# Altium PCB TEMP008-1P-2O.PcbDoc
Units mil, origin at the board's own origin, x right, y up, seen from the top; angles counter-clockwise.
Board outline 5100 x 4360 mil, 2 copper layers (Top Layer, Bottom Layer); 93 components, 50 nets, 253 pads, 13 vias.
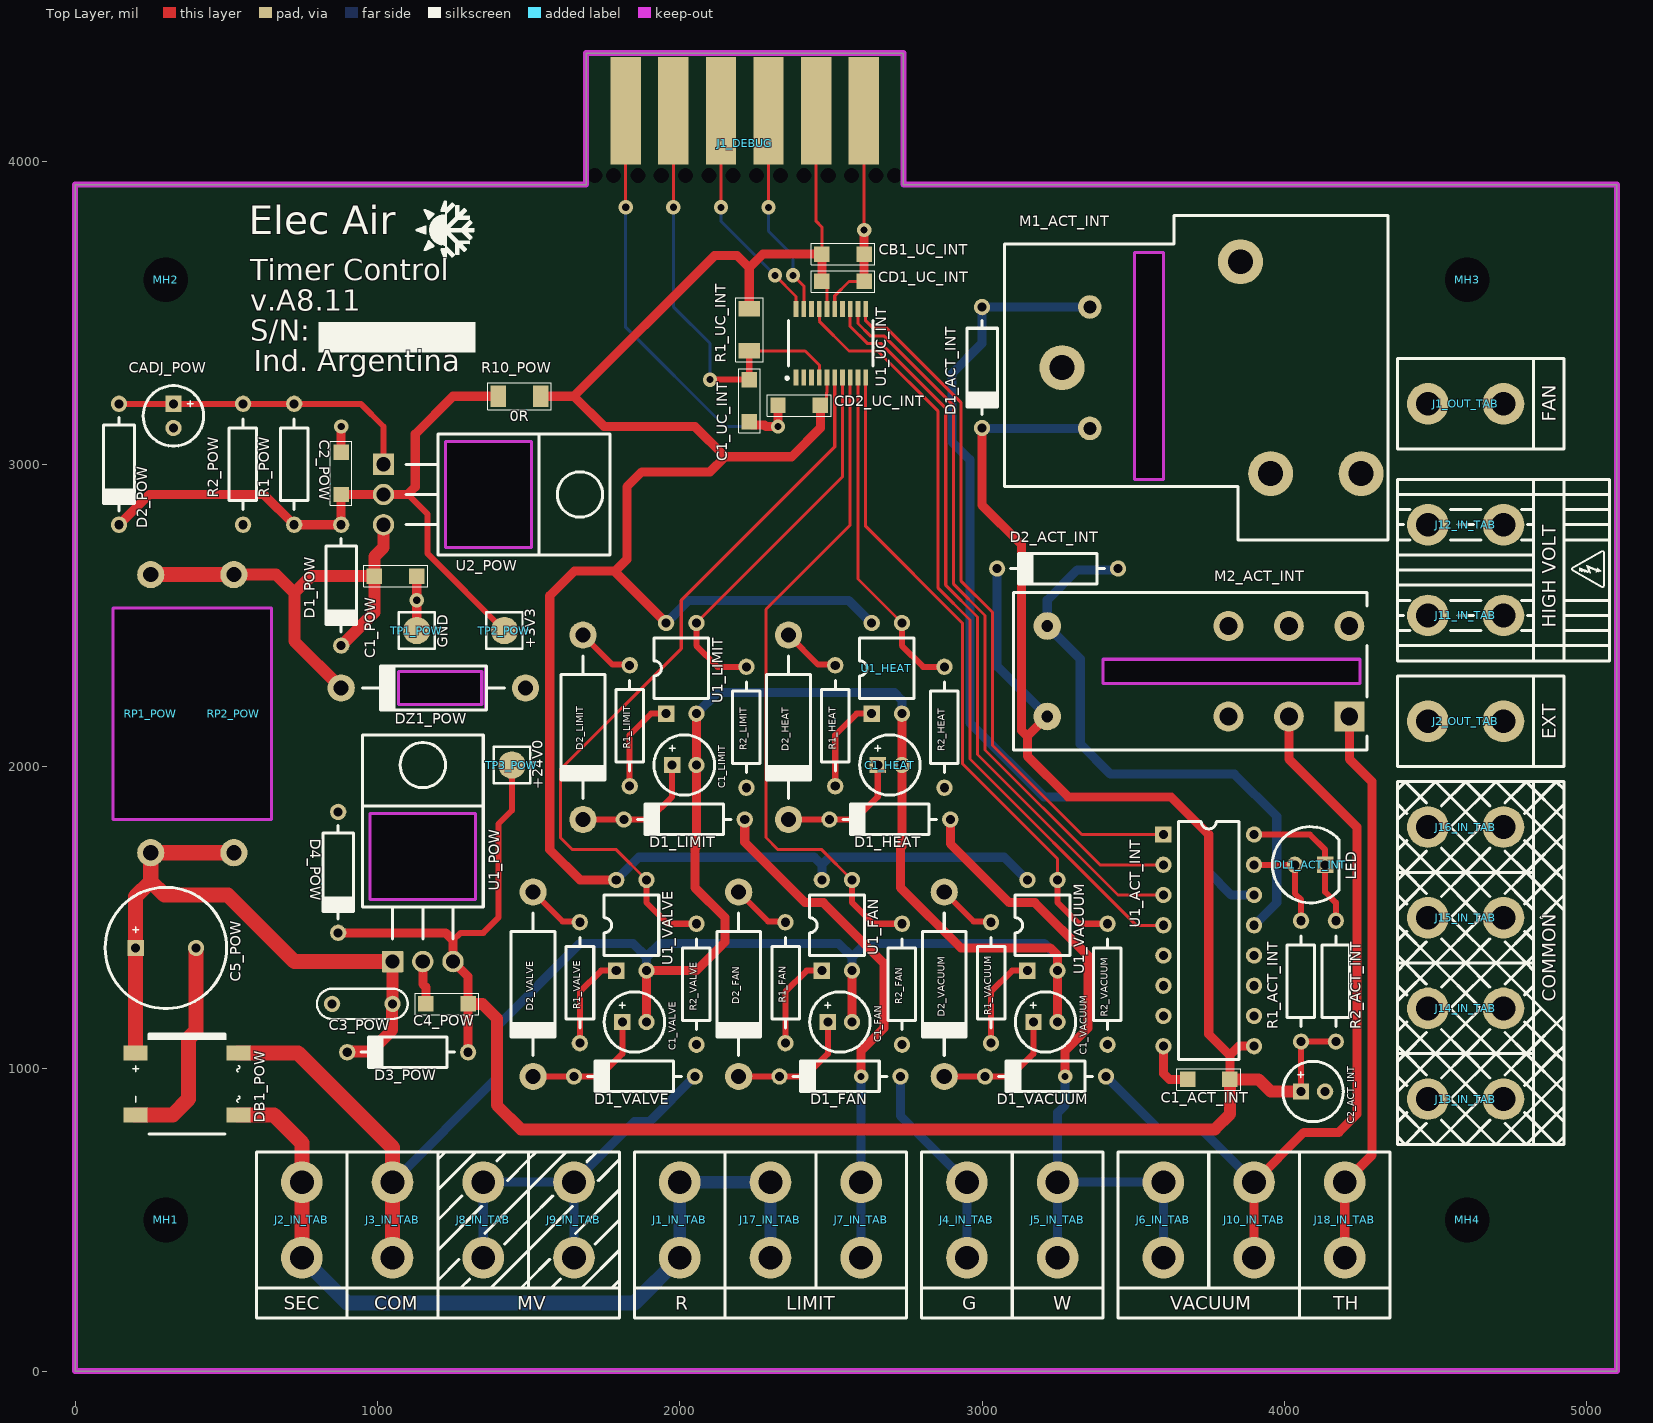
[diagram p0: Top Layer view]
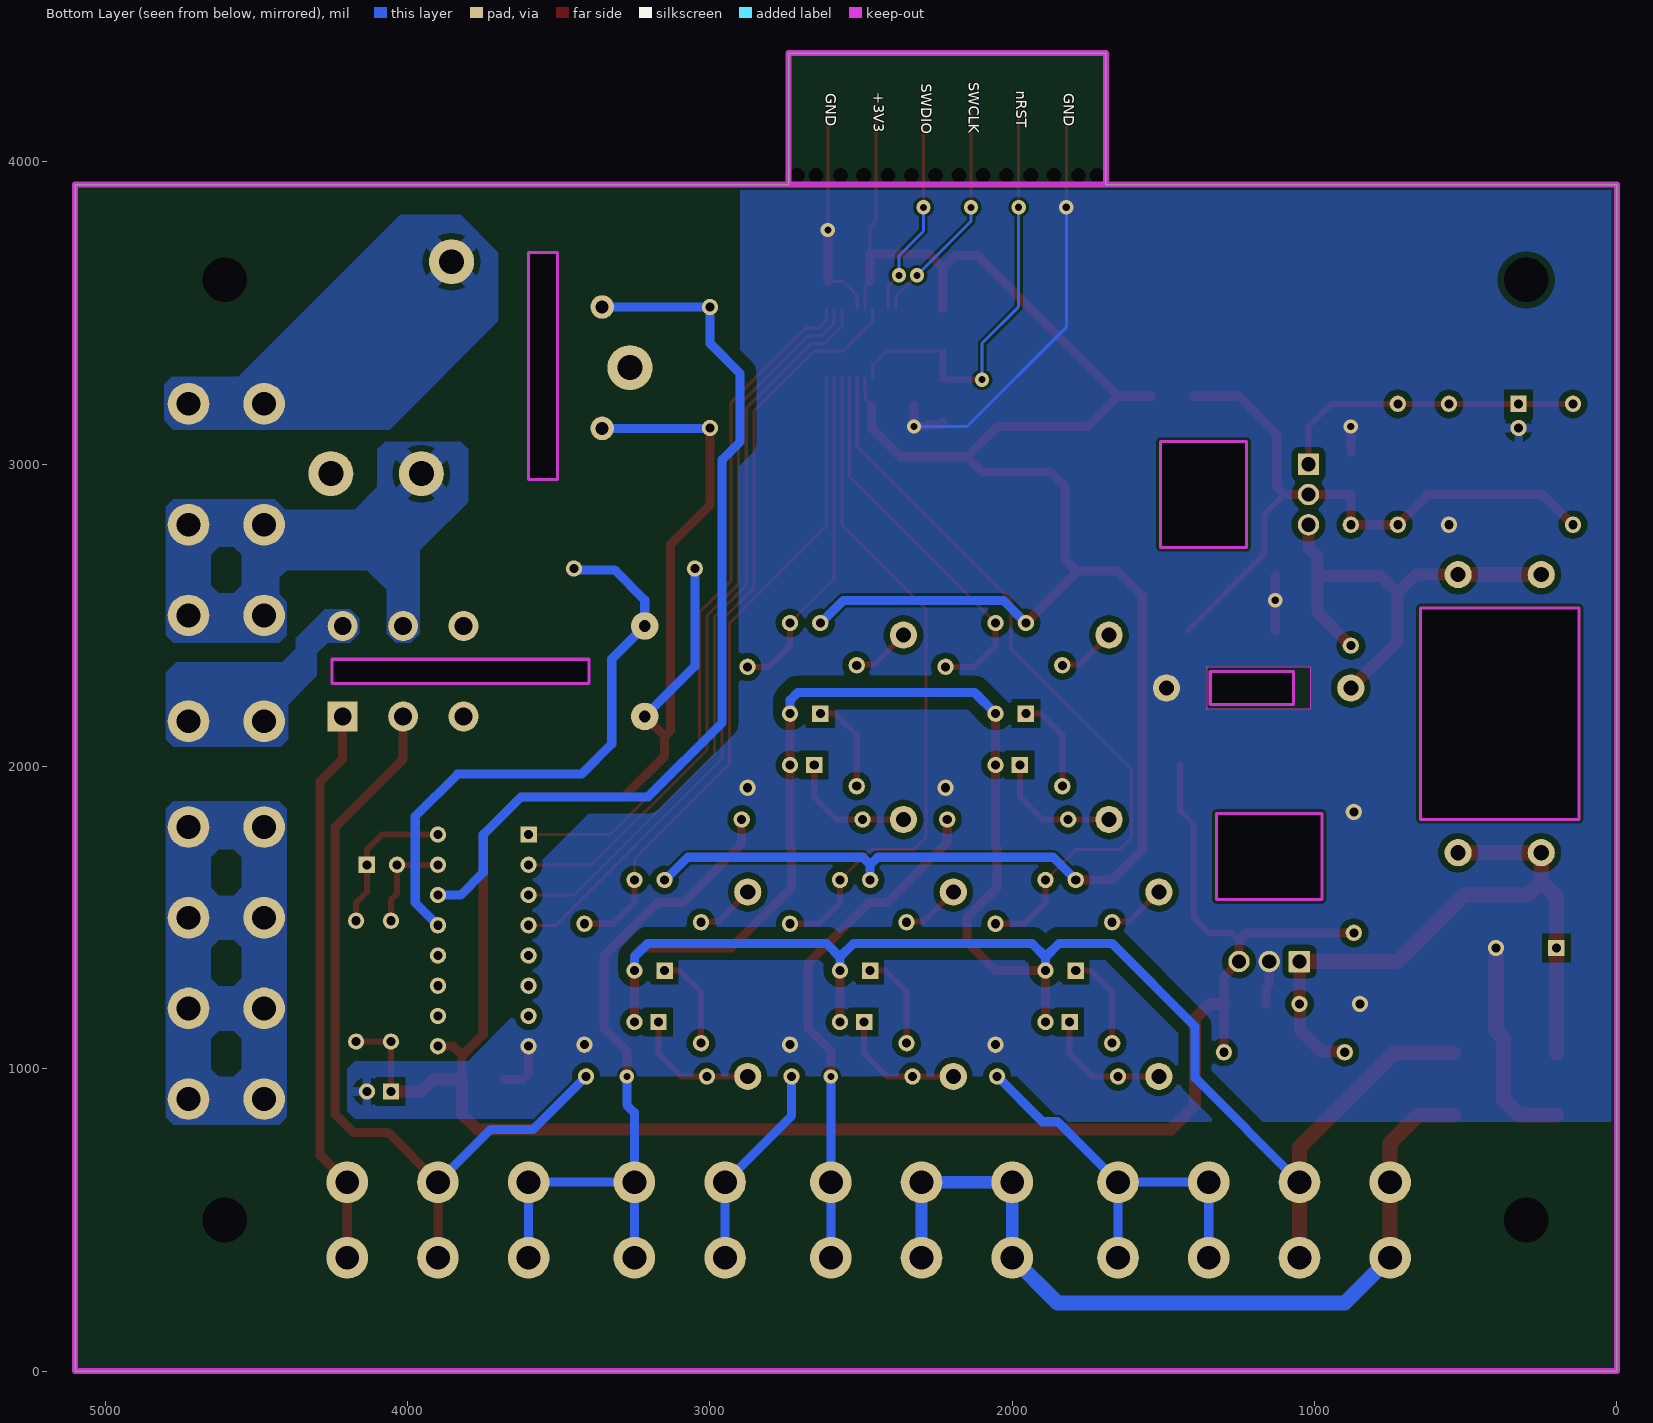
[diagram p1: Bottom Layer view, seen from below]
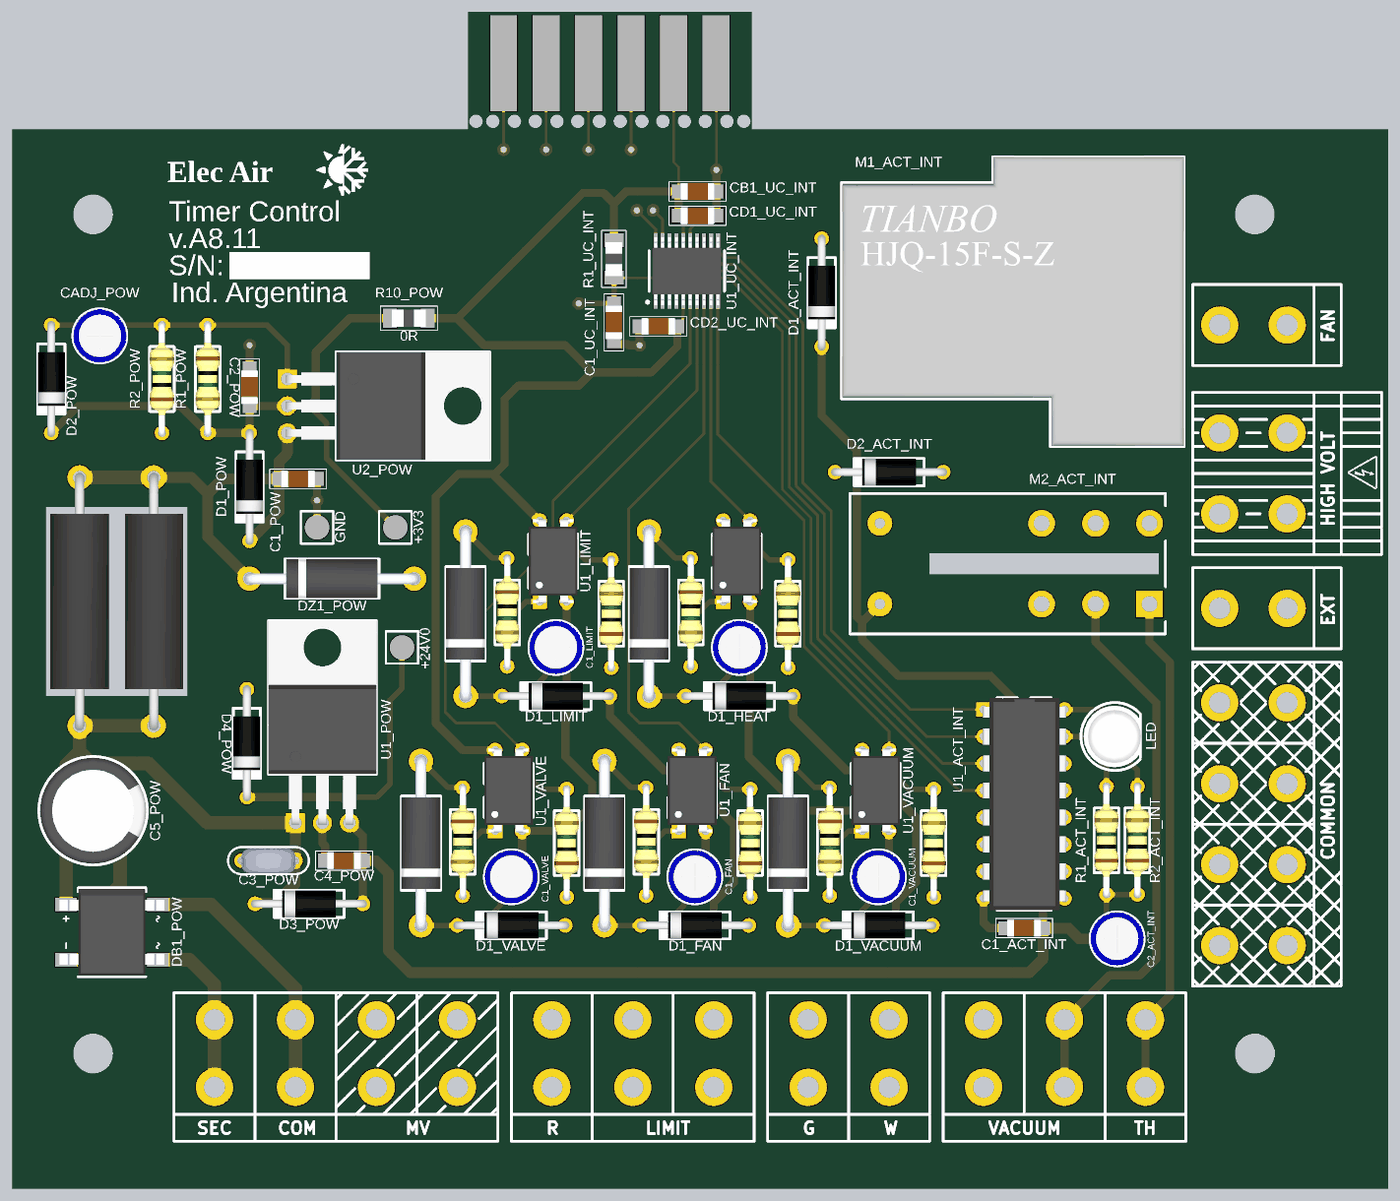
[diagram p2: 3D render of the assembled board from above, using the file's embedded part models]

## Layer stack, top to bottom
Top Solder: solder mask 0.4, Solder Resist, Dk 3.5
Top Layer: signal copper 1.4
Dielectric 1: dielectric 12.6, FR-4, Dk 4.8
Bottom Layer: signal copper 1.4
Bottom Solder: solder mask 0.4, Solder Resist, Dk 3.5

## Board outline
0,0 0,3925 1690,3925 1690,4360 2740,4360 2740,3925 5100,3925 5100,0
cut-out: 1070,2205 1070,2315 1345,2315 1345,2205
cut-out: 975,1560 975,1845 1325,1845 1325,1560
cut-out: 3400,2275 3400,2355 4250,2355 4250,2275
cut-out: 3505,2950 3600,2950 3600,3700 3505,3700
cut-out: 1225,2725 1225,3075 1510,3075 1510,2725
cut-out: 125,1825 125,2525 650,2525 650,1825

## Design rules (kind name [scope] priority, off if disabled: settings)
BoardOutlineClearance [NOT (InPadClass('J1-DEBUG'))] p1: gap=7.87 ignorepadtopadclearanceinfootprint=FALSE except(15.75: Arc-SplitBarrior Arc-SplitContinuation Track-SplitBarrior Track-SplitContinuation SMDPad-SplitBarrior SMDPad-SplitContinuation THPad-SplitBarrior THPad-SplitContinuation Via-SplitBarrior Via-SplitContinuation Fill-SplitBarrior Fill-SplitContinuation Poly-SplitBarrior Poly-SplitContinuation Region-SplitBarrior Region-SplitContinuation Text-SplitBarrior Text-SplitContinuation)
Clearance Clearance_Poly_Fiducials [InPolygon vs InComponentClass('Fiducials')] p1: gap=20 ignorepadtopadclearanceinfootprint=FALSE
Clearance Clearance_Poly_Tooling [InPolygon vs InComponentClass('Tooling')] p2: gap=10 ignorepadtopadclearanceinfootprint=FALSE
Clearance Clearance_Poly_THT [InPolygon vs InThruComponent] p3: gap=20 ignorepadtopadclearanceinfootprint=FALSE
Clearance Clearance_Poly_GRL [InPolygon vs IsVia] p4: gap=10 ignorepadtopadclearanceinfootprint=FALSE
Clearance Clearance_Poly_RTN [InPolygon AND InNet('GND') vs InNet('RTN') OR InNet('FAN_DRV')] p5: gap=40 ignorepadtopadclearanceinfootprint=FALSE
Clearance PCB-TAB [InPadClass('J1-DEBUG') vs IsTrack] p6: gap=-1 ignorepadtopadclearanceinfootprint=FALSE
Clearance "Clearance Bottom Layer" [OnLayer('Bottom Layer')] p7: gap=8 ignorepadtopadclearanceinfootprint=TRUE except(10: Arc-Text Track-Text SMDPad-Text THPad-Text Via-Text Fill-Text Poly-Text Region-Text Text-Text)
Clearance "Clearance Top Layer" [OnLayer('Top Layer')] p8: gap=8 ignorepadtopadclearanceinfootprint=TRUE except(10: Arc-Text Track-Text SMDPad-Text THPad-Text Via-Text Fill-Text Poly-Text Region-Text Text-Text)
Clearance [All] p9: gap=7.87 ignorepadtopadclearanceinfootprint=FALSE except(3.5: Arc-Arc Arc-Track Arc-SMDPad Track-Track Track-SMDPad SMDPad-SMDPad; 5: Arc-Via Track-Via SMDPad-Via THPad-Via Via-Via; 10: Arc-Text Track-Text SMDPad-Text THPad-Text Via-Text Fill-Text Poly-Text Region-Text Text-Text)
ComponentClearance MH [InComponentClass('MountHole') vs InComponentClass('Fiducials')  OR InComponentClass('Tooling')] p1: gap=-1 collisioncheckmode=3 verticalgap=-1 showdistances=FALSE
ComponentClearance [All] p2: gap=10 collisioncheckmode=3 verticalgap=10 showdistances=FALSE
HoleSize [All] p1: absolutevalues=TRUE maxlimit=248.03 minlimit=7.87 maxpercent=80.000 minpercent=20.000
MinimumAnnularRing [All] p1: minimumring=3
MinimumSolderMaskSliver [All] p1: minsoldermaskwidth=3.94
PolygonConnect Relay [HasFootprint('HJQ-15F-FORM-C') vs IsPolygon] p1: connectstyle=Relief reliefconductorwidth=55 reliefentries=4 polygonreliefangle="45 Angle" airgapwidth=20
PolygonConnect Components [HasFootprint('TAB250') vs IsPolygon] p2: connectstyle=Direct reliefconductorwidth=20 reliefentries=4 polygonreliefangle="90 Angle" airgapwidth=20
PolygonConnect CAP100RP [HasFootprint('CAP100RP') vs IsPolygon] p3: connectstyle=Relief reliefconductorwidth=30 reliefentries=4 polygonreliefangle="90 Angle" airgapwidth=20
PolygonConnect [All] p4: thpad.connectstyle=Direct thpad.reliefconductorwidth=20 thpad.reliefentries=4 thpad.polygonreliefangle="90 Angle" thpad.airgapwidth=20 smdpad.connectstyle=Relief smdpad.reliefconductorwidth=40 smdpad.reliefentries=4 smdpad.polygonreliefangle="90 Angle" smdpad.airgapwidth=20 via.connectstyle=Direct via.reliefconductorwidth=20 via.reliefentries=4 via.polygonreliefangle="90 Angle" via.airgapwidth=10
RoutingCorners [All] p1: cornerstyle=Round minsetback=100 maxsetback=100
RoutingVias [All] p1: holewidth=19.68 width=39.37 viastyle="Through Hole" minholewidth=7.87 minwidth=17.72 maxholewidth=39.37 maxwidth=78.74
SilkToSilkClearance [All] p1: silktosilkclearance=3.94
SilkToSolderMaskClearance [IsPad] p1: minsilkscreentomaskgap=3.94 clearancetoexposedcopper=TRUE
SolderMaskExpansion [All] p1: expansion=4 istentingtop=FALSE
Width [All] p1: maxlimit=200 minlimit=6 preferedwidth=15
24 further rules are at their usual default settings.

## Classes and differential pairs
pad class J1-DEBUG: J1_DEBUG-1 J1_DEBUG-2 J1_DEBUG-3 J1_DEBUG-4 J1_DEBUG-5 J1_DEBUG-6 J1_DEBUG-NC
component class DEBUG: J1_DEBUG
component class Temporizador_V8_top: LL1 MH1 MH2 MH3 MH4 TL1 TL2
channel class InputISO_Block: FAN HEAT LIMIT VACUUM VALVE
component class VALVE: C1_VALVE D1_VALVE D2_VALVE R1_VALVE R2_VALVE U1_VALVE
component class VACUUM: C1_VACUUM D1_VACUUM D2_VACUUM R1_VACUUM R2_VACUUM U1_VACUUM
component class UC_INT: C1_UC_INT CB1_UC_INT CD1_UC_INT CD2_UC_INT R1_UC_INT U1_UC_INT
component class MountHole: MH1 MH2 MH3 MH4
component class POW: C1_POW C2_POW C3_POW C4_POW C5_POW CADJ_POW D1_POW D2_POW D3_POW D4_POW DB1_POW DZ1_POW R1_POW R2_POW R10_POW RP1_POW RP2_POW TP1_POW TP2_POW TP3_POW U1_POW U2_POW
component class OUT_TAB: J1_OUT_TAB J2_OUT_TAB
component class LIMIT: C1_LIMIT D1_LIMIT D2_LIMIT R1_LIMIT R2_LIMIT U1_LIMIT
component class IN_TAB: J1_IN_TAB J2_IN_TAB J3_IN_TAB J4_IN_TAB J5_IN_TAB J6_IN_TAB J7_IN_TAB J8_IN_TAB J9_IN_TAB J10_IN_TAB J11_IN_TAB J12_IN_TAB J13_IN_TAB J14_IN_TAB J15_IN_TAB J16_IN_TAB J17_IN_TAB J18_IN_TAB
component class HEAT: C1_HEAT D1_HEAT D2_HEAT R1_HEAT R2_HEAT U1_HEAT
component class FAN: C1_FAN D1_FAN D2_FAN R1_FAN R2_FAN U1_FAN
component class ACT_INT: C1_ACT_INT C2_ACT_INT D1_ACT_INT D2_ACT_INT DL1_ACT_INT M1_ACT_INT M2_ACT_INT R1_ACT_INT R2_ACT_INT U1_ACT_INT

## Components (designator, comment, footprint, x,y, rotation, side; value= is the part's Value field where it differs from the comment)
C1_ACT_INT "0.1uF" 1206-CAP-TDK 3750,965 r0 top (schematic designator C1)
C1_FAN "10uF/50V" CAP100RP 2530,1155 r0 top (schematic designator C1)
C1_HEAT "10uF/50V" CAP100RP 2695,2005 r0 top (schematic designator C1)
C1_LIMIT "10uF/50V" CAP100RP 2015,2005 r0 top (schematic designator C1)
C1_POW "0.1uF" 1206-CAP-TDK 1060,2630 r180 top (schematic designator C1)
C1_UC_INT "0.1uF" 1206-CAP-TDK 2230,3210 r90 top (schematic designator C1)
C1_VACUUM "10uF/50V" CAP100RP 3210,1155 r0 top (schematic designator C1)
C1_VALVE "10uF/50V" CAP100RP 1850,1155 r0 top (schematic designator C1)
C2_ACT_INT "10uF/50V" CAP100RP 4095,925 r0 top (schematic designator C2)
C2_POW "0.1uF" 1206-CAP-TDK 880,2970 r270 top (schematic designator C2)
C3_POW "0.33uF" CAP200 950,1215 r0 top (schematic designator C3)
C4_POW "0.1uF" 1206-CAP-TDK 1230,1215 r0 top (schematic designator C4)
C5_POW "100uF/63V" CAP200RP 300,1400 r0 top (schematic designator C5)
CADJ_POW "10uF/50V" CAP100RP 325,3160 r270 top (schematic designator CADJ)
CB1_UC_INT "4.7uF/50V" 1206-CAP-TDK 2540,3695 r180 top (schematic designator CB1)
CD1_UC_INT "0.1uF" 1206-CAP-TDK 2540,3605 r180 top (schematic designator CD1)
CD2_UC_INT "0.1uF" 1206-CAP-TDK 2395,3195 r0 top (schematic designator CD2)
D1_ACT_INT "1N4148" DO41 3000,3320 r270 top (schematic designator D1)
D1_FAN "1N4007" DO41 2530,975 r180 top (schematic designator D1)
D1_HEAT "1N4007" DO41 2695,1825 r180 top (schematic designator D1)
D1_LIMIT "1N4007" DO41 2015,1825 r180 top (schematic designator D1)
D1_POW "1N4007" DO41 880,2600 r270 top (schematic designator D1)
D1_VACUUM "1N4007" DO41 3210,975 r180 top (schematic designator D1)
D1_VALVE "1N4007" DO41 1850,975 r180 top (schematic designator D1)
D2_ACT_INT "1N4148" DO41 3250,2655 r180 top (schematic designator D2)
D2_FAN "1N4746A-G" DO40 2195,1280 r270 top (schematic designator D2)
D2_HEAT "1N4746A-G" DO40 2360,2130 r270 top (schematic designator D2)
D2_LIMIT "1N4746A-G" DO40 1680,2130 r270 top (schematic designator D2)
D2_POW "1N4007" DO41 145,3000 r270 top (schematic designator D2)
D2_VACUUM "1N4746A-G" DO40 2875,1280 r270 top (schematic designator D2)
D2_VALVE "1N4746A-G" DO40 1515,1280 r270 top (schematic designator D2)
D3_POW "1N4007" DO41 1100,1055 r180 top (schematic designator D3)
D4_POW "1N4007" DO41 870,1650 r270 top (schematic designator D4)
DB1_POW "DB107S" DBS 370,950 r90 top (schematic designator DB1)
DL1_ACT_INT "LED" "LED-5MM - BI" 4085,1675 r0 top (schematic designator DL1)
DZ1_POW "1N5349" DO40 1185,2260 r180 top (schematic designator DZ1)
J1_DEBUG "PCB-TAB6" PCB-TAB6 2215,4170 r0 top locked (schematic designator J1)
J1_IN_TAB "R" TAB250-250P 2000,500 r90 top (schematic designator J1)
J1_OUT_TAB "FAN" TAB250-250P 4600,3200 r180 top (schematic designator J1)
J2_IN_TAB "SEC" TAB250-250P 750,500 r90 top (schematic designator J2)
J2_OUT_TAB "EXT" TAB250-250P 4600,2150 r180 top (schematic designator J2)
J3_IN_TAB "COM" TAB250-250P 1050,500 r90 top (schematic designator J3)
J4_IN_TAB "G" TAB250-250P 2950,500 r90 top (schematic designator J4)
J5_IN_TAB "W" TAB250-250P 3250,500 r90 top (schematic designator J5)
J6_IN_TAB "W" TAB250-250P 3600,500 r90 top (schematic designator J6)
J7_IN_TAB "LIMIT" TAB250-250P 2600,500 r90 top (schematic designator J7)
J8_IN_TAB "MV" TAB250-250P 1350,500 r90 top (schematic designator J8)
J9_IN_TAB "MV" TAB250-250P 1650,500 r90 top (schematic designator J9)
J10_IN_TAB "VACUUM" TAB250-250P 3900,500 r90 top (schematic designator J10)
J11_IN_TAB "HIGH VOLT" TAB250-250P 4600,2500 r180 top (schematic designator J11)
J12_IN_TAB "HIGH VOLT" TAB250-250P 4600,2800 r180 top (schematic designator J12)
J13_IN_TAB "COMMON" TAB250-250P 4600,900 r180 top (schematic designator J13)
J14_IN_TAB "COMMON" TAB250-250P 4600,1200 r180 top (schematic designator J14)
J15_IN_TAB "COMMON" TAB250-250P 4600,1500 r180 top (schematic designator J15)
J16_IN_TAB "COMMON" TAB250-250P 4600,1800 r180 top (schematic designator J16)
J17_IN_TAB "LIMIT" TAB250-250P 2300,500 r90 top (schematic designator J17)
J18_IN_TAB "TH" TAB250-250P 4200,500 r90 top (schematic designator J18)
M1_ACT_INT "FAN" HJQ-15F-FORM-C 3248.7,3319.61 r270 top locked (schematic designator M1)
M2_ACT_INT "EXT" TRA3-2-FORM-C 3684.29,2315.39 r180 top locked (schematic designator M2)
MH1 "MH-3.75MM" MH-3.75mm-NP 300,500 r0 top locked
MH2 "MH-3.75MM" MH-3.75mm-NP 300,3610 r0 top locked
MH3 "MH-3.75MM" MH-3.75mm-NP 4605,3610 r0 top locked
MH4 "MH-3.75MM" MH-3.75mm-NP 4605,500 r0 top
R1_ACT_INT "8K2/1%" RES400 4055,1290 r90 top (schematic designator R1)
R1_FAN "3K3/1%" RES400 2350,1285 r270 top (schematic designator R1)
R1_HEAT "3K3/1%" RES400 2515,2135 r270 top (schematic designator R1)
R1_LIMIT "3K3/1%" RES400 1835,2135 r270 top (schematic designator R1)
R1_POW "240/1%" RES400 725,3000 r270 top (schematic designator R1)
R1_UC_INT "4K7/1%" 1206-RES-PANASONIC 2230,3445 r270 top (schematic designator R1)
R1_VACUUM "3K3/1%" RES400 3030,1285 r270 top (schematic designator R1)
R1_VALVE "3K3/1%" RES400 1670,1285 r270 top (schematic designator R1)
R2_ACT_INT "8K2/1%" RES400 4170,1290 r90 top (schematic designator R2)
R2_FAN "5K6/1%" RES400 2735,1280 r90 top (schematic designator R2)
R2_HEAT "5K6/1%" RES400 2875,2130 r90 top (schematic designator R2)
R2_LIMIT "5K6/1%" RES400 2220,2130 r90 top (schematic designator R2)
R2_POW "390/1%" RES400 555,3000 r90 top (schematic designator R2)
R2_VACUUM "5K6/1%" RES400 3415,1280 r90 top (schematic designator R2)
R2_VALVE "5K6/1%" RES400 2055,1280 r90 top (schematic designator R2)
R10_POW "0R" 1206-RES-PANASONIC 1470,3225 r0 top (schematic designator R10)
RP1_POW "390/3W" "RES1000 - NOSILK" 250,2175 r90 top (schematic designator RP1)
RP2_POW "390/3W" "RES1000 - NOSILK" 525,2175 r90 top (schematic designator RP2)
TP1_POW "GND" "TPTH - PAD TOP" 1130,2450 r0 top (schematic designator TP1)
TP2_POW "+3V3" "TPTH - PAD TOP" 1420,2450 r0 top (schematic designator TP2)
TP3_POW "+24V0" "TPTH - PAD TOP" 1445,2005 r0 top (schematic designator TP3)
U1_ACT_INT "ULN2003" DIP16 3750,1425 r0 top (schematic designator U1)
U1_FAN "TLP521-1GB" DIP4 2520,1475 r90 top (schematic designator U1)
U1_HEAT "TLP521-1GB" DIP4 2685,2325 r90 top (schematic designator U1)
U1_LIMIT "TLP521-1GB" DIP4 2005,2325 r90 top (schematic designator U1)
U1_POW "L7824ACV-DG" "TO-220 - DG - RA" 1150,1355 r0 top (schematic designator U1)
U1_UC_INT "STM32F031F6P7" "ST-TSSOP-20 - STM32F031F6P7" 2500,3400 r90 top (schematic designator U1)
U1_VACUUM "TLP521-1GB" DIP4 3200,1475 r90 top (schematic designator U1)
U1_VALVE "TLP521-1GB" DIP4 1840,1475 r90 top (schematic designator U1)
U2_POW "LM317KCS" "TO-220 - KCS0003B - RA" 1020,2900 r270 top (schematic designator U2)

## Footprints (in the part's own frame and the unit in brackets; to place one, negate y for a bottom-side part, rotate by r counter-clockwise, add the part's x,y. Pads: shape width x height; smd on the part's side, far side on the other; paste and mask are expansions set on the pad)
1206-CAP-TDK [mm]
  rect 1.3x1.3 smd: 1(-1.778,0) 2(1.778,0)
  silkscreen extent -2.68,-0.9 2.68,0.9, body extent -1.6,-0.8 1.6,0.8, height 1.8
1206-RES-PANASONIC [mm]
  rect 1.3x1.8 smd: 1(-1.778,0) 2(1.778,0)
  silkscreen extent -2.68,-1.15 2.68,1.15, body extent -1.6,-0.8 1.6,0.8, height 0.65
CAP100RP [mil] "Body diameter 5mm"
  rect 54x54 hole 30: 1(-40,0)
  round 54 hole 30: 2(40,0)
  silkscreen extent -100,-100 100,100, body extent -99,-99 99,100, height 454
CAP200 [mil]
  round 54 hole 30: 1(-100,0) 2(100,0)
  silkscreen extent -150,-50 150,50, body extent -110,-46 110,44, height 246
CAP200RP [mil] "Body Diameter 10.33mm"
  rect 54x54 hole 30: 1(-100,0)
  round 54 hole 30: 2(100,0)
  silkscreen extent -201,-201 201,201, body extent -197,-197 197,197, height 787
DBS [mil]
  rect 50x80 smd: 1(-102.36,-170) 2(102.36,170) 3(102.36,-170) 4(-102.36,170)
  silkscreen extent -165,-175 165,180, body extent -160,-195 160,195, height 106
DIP4 [mil]
  rect 54x54 hole 30: 1(-150,50)
  round 54 hole 30: 2(-150,-50) 3(150,-50) 4(150,50)
  silkscreen extent -100,-91 100,91, body extent -155,-91 155,91, height 173
DIP16 [mil]
  rect 54x54 hole 30: 1(-150,350)
  round 54 hole 30: 2(-150,250) 3(-150,150) 4(-150,50) 5(-150,-50) 6(-150,-150) 7(-150,-250) 8(-150,-350) 9(150,-350) 10(150,-250) 11(150,-150) 12(150,-50) 13(150,50) 14(150,150) 15(150,250) 16(150,350)
  silkscreen extent -100,-394 100,394, body extent -153,-394 157,394, height 78
DO40 [mil]
  round 90 hole 50: 1(-305,0) 2(305,0)
  silkscreen extent -235,-73 235,73, body extent -324,-73 324,73, height 145
DO41 [mil]
  round 54 hole 30: 1(-200,0) 2(200,0)
  silkscreen extent -155,-51 155,51, body extent -215,-51 215,51, height 80
HJQ-15F-FORM-C [mm]
  round 3.78 hole 2.1: 1C(0,0.404) 1S(-8.9,15.4) 3(8.9,17.94) 4(8.9,25.54)
  round 1.98 hole 1.1: 2(5.1,2.74) 5(-5.1,2.74)
  silkscreen extent -12.8,-4.45 14.48,27.8, body extent -12.8,-4.4 14.4,27.8, height 20.2
"LED-5MM - BI" [mil]
  round 54 hole 30: 1(-50,0)
  rect 54x54 hole 30: 2(50,0)
  silkscreen extent -124,-126 96,126, body extent -114,-114 99,114, height 476
MH-3.75mm-NP [mm]
  round 3 hole 3.75 unplated: 1(0,0)
PCB-TAB6 [mil] "External Tabs x 6, Pitch 4mm"
  rect 100x355 smd: 1(-393.7,0) 2(-236.22,0) 3(-78.74,0) 4(78.74,0) 5(236.22,0) 6(393.7,0)
  round 30 hole 50 unplated: NC(-496.18,-215) NC(-433.7,-215) NC(-353.7,-215) NC(-276.22,-215) NC(-196.22,-215) NC(-118.74,-215) NC(-38.74,-215) NC(38.74,-215) NC(118.74,-215) NC(196.22,-215) NC(276.22,-215) NC(353.7,-215) NC(433.7,-215) NC(496.18,-215)
RES400 [mil]
  round 54 hole 30: 1(-200,-0.5) 2(200,-0.5)
  silkscreen extent -150,-46 150,46, body extent -212,-46 212,46, height 96
"RES1000 - NOSILK" [mil]
  round 90 hole 50: 1(-460,0) 2(460,0)
  body extent -477,-109 477,109, height 225
"ST-TSSOP-20 - STM32F031F6P7" [mm]
  rect 1.35x0.4 smd mask+0.05: 1(-2.875,2.925) 2(-2.875,2.275) 3(-2.875,1.625) 4(-2.875,0.975) 5(-2.875,0.325) 6(-2.875,-0.325) 7(-2.875,-0.975) 8(-2.875,-1.625) 9(-2.875,-2.275) 10(-2.875,-2.925) 11(2.875,-2.925) 12(2.875,-2.275) 13(2.875,-1.625) 14(2.875,-0.975) 15(2.875,-0.325) 16(2.875,0.325) 17(2.875,0.975) 18(2.875,1.625) 19(2.875,2.275) 20(2.875,2.925)
  silkscreen extent -3.02,-3.56 1.91,3.78, body extent -3.2,-3.25 3.2,3.25, height 1.23
TAB250-250P [mm]
  round 3.5 hole 2: 1(-3.175,0) 2(3.175,0)
  silkscreen extent -5.71,-3.81 5.71,3.81, body extent -3.87,-1.55 3.87,1.55, height 9.91
"TO-220 - DG - RA" [mm]
  rrect6% 1.8x1.8 hole 1.2 mask+0.07: 1(-2.54,0)
  round 1.8 hole 1.2 mask+0.07: 2(0,0) 3(2.54,0)
  silkscreen extent -5.08,1.91 5.08,19.05, body extent -5.08,-0.19 5.08,19.09, height 4.45
"TO-220 - KCS0003B - RA" [mm]
  rrect6% 1.8x1.8 hole 1.2 mask+0.07: 1(-2.54,0)
  round 1.8 hole 1.2 mask+0.07: 2(0,0) 3(2.54,0)
  silkscreen extent -5.08,1.9 5.08,19.05, body extent -5.08,-0.19 5.08,19.09, height 4.45
"TPTH - PAD TOP" [mm]
  round 2.3 smd: 1(0,0)
  silkscreen extent -1.52,-1.52 1.52,1.52
TRA3-2-FORM-C [mm]
  rect 2.52x2.52 hole 1.5: 1(-13.48,3.8)
  round 2.52 hole 1.5: 2(-8.4,3.8) 3(-3.32,3.8) 6(-3.32,-3.8) 7(-8.4,-3.8) 8(-13.48,-3.8)
  round 2.32 hole 1: 4(11.9,3.8) 5(11.9,-3.8)
  silkscreen extent -14.99,-6.6 14.73,6.6, body extent -14.5,-6.35 14.5,6.35, height 20.4

## Part data
C1_ACT_INT C1_POW C1_UC_INT C2_POW C4_POW CD1_UC_INT CD2_UC_INT: library part CAP-SMD, JLCPart=C24497
C1_FAN C1_HEAT C1_LIMIT C1_VACUUM C1_VALVE C2_ACT_INT CADJ_POW: library part CAPPOL-THT, JLCPart=C2960372
C3_POW: library part CAP-THT, JLCPart=C2761750
C5_POW: library part CAPPOL-THT, JLCPart=C165651
CB1_UC_INT: library part CAP-SMD, JLCPart=C29823
D1_ACT_INT D2_ACT_INT: library part "DIODE SCHOTTKY", "Diode Schottky", JLCPart=C258182
D1_FAN D1_HEAT D1_LIMIT D1_POW D1_VACUUM D1_VALVE D2_POW D3_POW D4_POW: library part "DIODE RECTIFIER", "Diode Rectifier", JLCPart=C3033995
D2_FAN D2_HEAT D2_LIMIT D2_VACUUM D2_VALVE: library part "DIODE ZENER", "Diode Zener", JLCPart=C391338
DB1_POW: "Bridge Rectifier Single Phase Standard 1000 V Surface Mount 4-MiniDIP", JLCPart=C5377
DL1_ACT_INT: library part LED-BI
DZ1_POW: library part "DIODE ZENER", "Diode Zener", JLCPart=C232446
J1_IN_TAB J1_OUT_TAB J2_IN_TAB J2_OUT_TAB J3_IN_TAB J4_IN_TAB J5_IN_TAB J6_IN_TAB J7_IN_TAB J8_IN_TAB J9_IN_TAB J10_IN_TAB J11_IN_TAB J12_IN_TAB J13_IN_TAB J14_IN_TAB J15_IN_TAB J16_IN_TAB J17_IN_TAB J18_IN_TAB: library part TAB250
M1_ACT_INT: library part "RELE SIMPLE M"
M2_ACT_INT: library part "RELE DOBLE"
R1_ACT_INT R2_ACT_INT: library part RES-THT, JLCPart=C337170
R1_FAN R1_HEAT R1_LIMIT R1_VACUUM R1_VALVE: library part RES-THT, JLCPart=C119335
R1_POW: library part RES-THT, JLCPart=C119310
R1_UC_INT: library part RES-SMD, JLCPart=C17936
R2_FAN R2_HEAT R2_LIMIT R2_VACUUM R2_VALVE: library part RES-THT, JLCPart=C173035
R2_POW: library part RES-THT, JLCPart=C119315
R10_POW: library part RES-SMD
RP1_POW RP2_POW: library part RES-THT, JLCPart=C348872
TP1_POW TP2_POW TP3_POW: library part TP-PAD
U1_ACT_INT: JLCPart=C93000
U1_FAN U1_HEAT U1_LIMIT U1_VACUUM U1_VALVE: library part TLP521-1, JLCPart=C69256
U1_UC_INT: "ARM® Cortex®-M0 STM32F0 Microcontroller IC 32-Bit Single-Core 48MHz 32KB (32K x 8) FLASH 20-TSSOP", JLCPart=C117472
MH1 MH2 MH3 MH4: ClassName=MountHole

## Via types
v1: diameter 47.24, hole 23.62, Top Layer to Bottom Layer, tented both sides, 13 vias

## Nets (pads, with @x,y where several pads share a name; then routed paths per layer and width w, separated by ;. In a path a pad name is that pad's centre, name@x,y a point inside that pad or via, vN(x,y) a via of type N, cw(c..) or ccw(c..) an arc to the next point about the centre after c; other vN are vias at no path point)
220V_AC: J11_IN_TAB.1 J11_IN_TAB.2 J12_IN_TAB.1 J12_IN_TAB.2 M1_ACT_INT.3 M2_ACT_INT.7
+3V3: CB1_UC_INT.2 CD1_UC_INT.2 CD2_UC_INT.2 J1_DEBUG.5 R1_UC_INT.1 R10_POW.2 U1_FAN.4 U1_HEAT.4 U1_LIMIT.4 U1_UC_INT.5 U1_UC_INT.16 U1_VACUUM.4 U1_VALVE.4 | length 7567.1
  Top Layer w10: J1_DEBUG.5 2451.22,3803.78 2470,3785 CB1_UC_INT.2 ; CD2_UC_INT.2 2485,3215 2485,3235 2487.2,3237.2 U1_UC_INT.5 ; CD1_UC_INT.2 2487.2,3587.8 U1_UC_INT.16
  Top Layer w30: R10_POW.2 1650,3225 ; U1_VALVE.4 1670,1625 1570,1725 1570,2565 1652.5,2647.5 1787.5,2647.5 ; U1_LIMIT.4 1787.5,2642.5 1787.5,2647.5 ; R1_UC_INT.1 2230,3650 ; CD2_UC_INT.2 2465,3120 2370,3025 2150,3025 ; CD1_UC_INT.2 CB1_UC_INT.2 2275,3695 2230,3650 ; 1650,3225 1750,3125 2050,3125 2150,3025 ; 1650,3225 2115,3690 2190,3690 2230,3650 ; 1787.5,2647.5 1825,2685 1825,2925 1875,2975 2100,2975 2150,3025
  Bottom Layer w30: U1_VALVE.4 1865,1700 2445,1700 2470,1675 ; U1_LIMIT.4 2030,2550 2558.18,2550 2633.18,2475 U1_HEAT.4 ; U1_FAN.4 2470,1675 ; U1_VACUUM.4 3148.18,1625 3073.18,1700 2495,1700 2470,1675
+24V_DC: C1_ACT_INT.2 C2_ACT_INT.1 C4_POW.2 D1_ACT_INT.2 D2_ACT_INT.2 D3_POW.1 D4_POW.2 M1_ACT_INT.2 M2_ACT_INT.4 R1_ACT_INT.1 R2_ACT_INT.1 TP3_POW.1 U1_ACT_INT.9 U1_POW.3 | length 8807.1
  Top Layer w20: 1250,1425 1275,1450 1350,1450 1400,1500 1400,1810 1445,1855 TP3_POW.1 ; C2_ACT_INT.1 4055.5,925.5 R1_ACT_INT.1 R2_ACT_INT.1
  Top Layer w30: D4_POW.2 1225,1450 1250,1425 U1_POW.3 1300,1305 C4_POW.2 D3_POW.1 ; D1_ACT_INT.2 3000,2865 3130,2735 3130,2120 3150,2100 ; M2_ACT_INT.4 3150,2100 ; C1_ACT_INT.2 3820,1045 ; U1_ACT_INT.9 3850,1075 3820,1045 ; 3150,2100 3150,2035 3285,1900 3625,1900 3750,1775 3750,1115 3820,1045
  Top Layer w40: C4_POW.2 1347.1,1215 1395,1167.1 1395,880 1475,800 3770,800 3820,850 C1_ACT_INT.2 3915,965 3955,925 C2_ACT_INT.1
  Bottom Layer w30: D1_ACT_INT.2@3000,3118.82 M1_ACT_INT.2 ; D2_ACT_INT.2 3050,2331.57 M2_ACT_INT.4
EXT_220V: J2_OUT_TAB.1 J2_OUT_TAB.2 M2_ACT_INT.8
EXT_DRV: D2_ACT_INT.1 M2_ACT_INT.5 U1_ACT_INT.13 | length 1938.9
  Bottom Layer w30: D2_ACT_INT.1 3445.41,2650.41 3315.41,2650.41 3215.79,2550.79 M2_ACT_INT.5 3325,2355.79 3325,2075 3425,1975 3835,1975 3975,1835 3975,1550 U1_ACT_INT.13
EXT_OUT: U1_ACT_INT.4 U1_UC_INT.17 | length 2618.1
  Top Layer w10: U1_UC_INT.17 2461.61,3473.39 2560,3375 2655,3375 2855,3175 2855,2590 2960,2485 2960,2025 3510,1475 U1_ACT_INT.4
FAN_220V: J1_OUT_TAB.1 J1_OUT_TAB.2 M1_ACT_INT.1S
FAN_DRV: D1_ACT_INT.1 M1_ACT_INT.5 U1_ACT_INT.14 | length 3047.2
  Bottom Layer w30: D1_ACT_INT.1 3000,3400 2900,3300 2900,3075 2960,3015 2960,2145 3205,1900 3625,1900 3750,1775 3750,1650 3825,1575 U1_ACT_INT.14 ; D1_ACT_INT.1@3000,3520.39 M1_ACT_INT.5
FAN_OUT: U1_ACT_INT.3 U1_UC_INT.13 | length 2481.6
  Top Layer w10: U1_UC_INT.13 2563.98,3456.02 2620,3400 2665,3400 2880,3185 2880,2600 2985,2495 2985,2040 3450,1575 U1_ACT_INT.3
G_DIG: R2_FAN.2 U1_FAN.3 U1_UC_INT.8 | length 2249.9
  Top Layer w10: U1_UC_INT.8 2563.98,2798.98 2285,2520 2285,1765 2325,1725 2470,1725 U1_FAN.3
  Top Layer w20: U1_FAN.3 2570,1550 2640,1480 R2_FAN.2
G_IN: D1_FAN.1 J4_IN_TAB.1 J4_IN_TAB.2 | length 691.1
  Bottom Layer w30: D1_FAN.1 2730,845 J4_IN_TAB.2 J4_IN_TAB.1
GND: C1_ACT_INT.1 C1_POW.1 C1_UC_INT.1 C2_ACT_INT.2 C2_POW.1 C3_POW.1 C4_POW.1 C5_POW.2 CADJ_POW.2 CB1_UC_INT.1 CD1_UC_INT.1 CD2_UC_INT.1 D4_POW.1 DB1_POW.4 DZ1_POW.1 J1_DEBUG.1 J1_DEBUG.6 R2_FAN.1 R2_HEAT.1 R2_LIMIT.1 R2_POW.1 R2_VACUUM.1 R2_VALVE.1 TP1_POW.1 U1_ACT_INT.8 U1_POW.2 U1_UC_INT.15 | length 3549.8
  Top Layer w10: v1(1821.3,3850.3) J1_DEBUG.1 ; U1_UC_INT.15 2512.8,3557.8 2560,3605 CD1_UC_INT.1 ; J1_DEBUG.6 2610,4168.7 v1(2610,3775)
  Top Layer w30: C2_POW.1 v1(880,3125) ; TP1_POW.1 v1(1130,2550) C1_POW.1 ; U1_POW.2 1150,1280 1160,1270 C4_POW.1 ; C1_UC_INT.1 2240.59,3129.41 2280.59,3129.41 2285,3125 v1(2325,3125) CD2_UC_INT.1 ; CD1_UC_INT.1 CB1_UC_INT.1 v1(2610,3775) ; U1_ACT_INT.8 3600,985 3620,965 C1_ACT_INT.1
  Top Layer w50: DB1_POW.4 322.64,847.64 375,900 375,1100 400,1125 C5_POW.2
  Bottom Layer w10: v1(1821.3,3850.3) 1820,3849 1820,3455 2150,3125 v1(2325,3125)
GREEN_CTRL: U1_ACT_INT.2 U1_UC_INT.12 | length 2406.1
  Top Layer w10: U1_UC_INT.12 2589.57,3465.43 2630,3425 2675,3425 2905,3195 2905,2605 3010,2500 3010,2055 3390,1675 U1_ACT_INT.2
GREEN_DRV: DL1_ACT_INT.1 R1_ACT_INT.2 U1_ACT_INT.15 | length 328.5
  Top Layer w20: U1_ACT_INT.15 DL1_ACT_INT.1 4035,1580 4055.5,1559.5 R1_ACT_INT.2
LIMIT_DIG: R2_LIMIT.2 U1_LIMIT.3 U1_UC_INT.7 | length 1281.5
  Top Layer w10: U1_LIMIT.3 2538.39,2958.39 U1_UC_INT.7
  Top Layer w20: U1_LIMIT.3 2055,2400 2125,2330 R2_LIMIT.2
LIMIT_IN: D1_LIMIT.1 J7_IN_TAB.1 J7_IN_TAB.2 | length 1706.8
  Top Layer w30: D1_LIMIT.1 2215,1750 2415,1550 2475,1550 2675,1350 2675,1135 2600,1060 v1(2600,975)
  Bottom Layer w30: J7_IN_TAB.1 J7_IN_TAB.2 v1(2600,975)
NetC1_FAN_1: C1_FAN.1 D1_FAN.2 D2_FAN.2 | length 431.1
  Top Layer w20: D2_FAN.2 D1_FAN.2 2415,975 2490,1050 C1_FAN.1
NetC1_HEAT_1: C1_HEAT.1 D1_HEAT.2 D2_HEAT.2 | length 431.1
  Top Layer w20: D2_HEAT.2 D1_HEAT.2 2580,1825 2655,1900 C1_HEAT.1
NetC1_LIMIT_1: C1_LIMIT.1 D1_LIMIT.2 D2_LIMIT.2 | length 431.1
  Top Layer w20: D2_LIMIT.2 D1_LIMIT.2 1900,1825 1975,1900 C1_LIMIT.1
NetC1_POW_2: C1_POW.2 D1_POW.2 DZ1_POW.2 RP1_POW.2 RP2_POW.2 U2_POW.3 | length 1624.8
  Top Layer w40: RP2_POW.2 665,2635 725,2575 ; DZ1_POW.2 725,2415 725,2575 ; D1_POW.2 990,2510 C1_POW.2 ; U2_POW.3 1020,2725 990,2695 C1_POW.2 ; 725,2575 780,2630 C1_POW.2
  Top Layer w50: RP1_POW.2 RP2_POW.2
NetC1_VACUUM_1: C1_VACUUM.1 D1_VACUUM.2 D2_VACUUM.2 | length 431.1
  Top Layer w20: D2_VACUUM.2 D1_VACUUM.2 3095,975 3170,1050 C1_VACUUM.1
NetC1_VALVE_1: C1_VALVE.1 D1_VALVE.2 D2_VALVE.2 | length 431.1
  Top Layer w20: D2_VALVE.2 D1_VALVE.2 1735,975 1810,1050 C1_VALVE.1
NetC2_POW_2: C2_POW.2 D1_POW.1 D2_POW.2 R1_POW.2 R10_POW.1 TP2_POW.1 U2_POW.2 | length 2257.2
  Top Layer w20: 1100.43,2900.43 1165,2835.87 1165,2705 TP2_POW.1
  Top Layer w30: D2_POW.2 245,2900 624.5,2900 R1_POW.2 D1_POW.1 C2_POW.2 U2_POW.2 ; U2_POW.2@1020.43,2900.43 1100.43,2900.43 1125,2925 1125,3100 1250,3225 R10_POW.1
NetC3_POW_2: C3_POW.2 C5_POW.1 D3_POW.2 DB1_POW.2 RP1_POW.1 RP2_POW.1 U1_POW.1 | length 2274.2
  Top Layer w40: D3_POW.2 902.68,1057.68 977.68,1057.68 1048,1128 1048,1213 C3_POW.2 U1_POW.1
  Top Layer w50: DB1_POW.2 C5_POW.1 200,1570 250,1620 ; RP2_POW.1 RP1_POW.1 250,1620 ; U1_POW.1 725,1355 505,1575 295,1575 250,1620
NetCADJ_POW_1: CADJ_POW.1 D2_POW.1 R1_POW.1 R2_POW.2 U2_POW.1 | length 1031.1
  Top Layer w20: D2_POW.1 CADJ_POW.1 R2_POW.2 R1_POW.1 945,3200 1020,3125 U2_POW.1
NetD2_FAN_1: D2_FAN.1 R1_FAN.1 | length 195.9
  Top Layer w20: D2_FAN.1 2292.5,1487.5 2347,1487.5 R1_FAN.1
NetD2_HEAT_1: D2_HEAT.1 R1_HEAT.1 | length 195.9
  Top Layer w20: D2_HEAT.1 2457.5,2337.5 2512,2337.5 R1_HEAT.1
NetD2_LIMIT_1: D2_LIMIT.1 R1_LIMIT.1 | length 195.9
  Top Layer w20: D2_LIMIT.1 1777.5,2337.5 1832,2337.5 R1_LIMIT.1
NetD2_VACUUM_1: D2_VACUUM.1 R1_VACUUM.1 | length 195.9
  Top Layer w20: D2_VACUUM.1 2972.5,1487.5 3027,1487.5 R1_VACUUM.1
NetD2_VALVE_1: D2_VALVE.1 R1_VALVE.1 | length 195.9
  Top Layer w20: D2_VALVE.1 1612.5,1487.5 1667,1487.5 R1_VALVE.1
NetDB1_POW_1: DB1_POW.1 J1_IN_TAB.1 J1_IN_TAB.2 J2_IN_TAB.1 J2_IN_TAB.2 J17_IN_TAB.1 J17_IN_TAB.2 | length 3002.6
  Top Layer w50: DB1_POW.1 657.36,847.64 750,755 J2_IN_TAB.1
  Bottom Layer w40: J1_IN_TAB.1 J1_IN_TAB.2 J17_IN_TAB.2 J17_IN_TAB.1@2300,400 ; J17_IN_TAB.1 J17_IN_TAB.1@2300,400 ; J17_IN_TAB.2@2300,600 J17_IN_TAB.1@2300,400
  Bottom Layer w50: J2_IN_TAB.1 900,225 1850,225 J1_IN_TAB.1
NetJ13_IN_TAB_1: J13_IN_TAB.1 J13_IN_TAB.2 J14_IN_TAB.1 J14_IN_TAB.2 J15_IN_TAB.1 J15_IN_TAB.2 J16_IN_TAB.1 J16_IN_TAB.2
NetR1_FAN_2: R1_FAN.2 U1_FAN.1 | length 319.2
  Top Layer w20: R1_FAN.2 2349.5,1254.5 2420,1325 U1_FAN.1
NetR1_HEAT_2: R1_HEAT.2 U1_HEAT.1 | length 319.2
  Top Layer w20: R1_HEAT.2 2514.5,2104.5 2585,2175 U1_HEAT.1
NetR1_LIMIT_2: R1_LIMIT.2 U1_LIMIT.1 | length 319.2
  Top Layer w20: R1_LIMIT.2 1834.5,2104.5 1905,2175 U1_LIMIT.1
NetR1_VACUUM_2: R1_VACUUM.2 U1_VACUUM.1 | length 319.2
  Top Layer w20: R1_VACUUM.2 3029.5,1254.5 3100,1325 U1_VACUUM.1
NetR1_VALVE_2: R1_VALVE.2 U1_VALVE.1 | length 319.2
  Top Layer w20: R1_VALVE.2 1669.5,1254.5 1740,1325 U1_VALVE.1
nRST: C1_UC_INT.2 J1_DEBUG.2 R1_UC_INT.2 U1_UC_INT.4 | length 1457.7
  Top Layer w10: v1(1978.78,3850.3) J1_DEBUG.2 ; R1_UC_INT.2 2415,3375 2461.61,3328.39 U1_UC_INT.4
  Top Layer w20: v1(2100,3280) C1_UC_INT.2 R1_UC_INT.2
  Bottom Layer w10: v1(1978.78,3850.3) 1978.78,3521.22 2100,3400 v1(2100,3280)
RED_CTRL: U1_ACT_INT.1 U1_UC_INT.11 | length 2330.6
  Top Layer w10: U1_UC_INT.11 2615.16,3474.84 2640,3450 2685,3450 2930,3205 2930,2615 3035,2510 3035,2070 3330,1775 U1_ACT_INT.1
RED_DRV: DL1_ACT_INT.2 R2_ACT_INT.2 U1_ACT_INT.16 | length 505.4
  Top Layer w20: U1_ACT_INT.16 4085,1775 4135,1725 DL1_ACT_INT.2 4135,1585 4170.5,1549.5 R2_ACT_INT.2
RTN: C1_FAN.2 C1_HEAT.2 C1_LIMIT.2 C1_VACUUM.2 C1_VALVE.2 DB1_POW.3 J3_IN_TAB.1 J3_IN_TAB.2 U1_FAN.2 U1_HEAT.2 U1_LIMIT.2 U1_VACUUM.2 U1_VALVE.2 | length 7446.9
  Top Layer w30: C1_VALVE.2 U1_VALVE.2 2055,1325 2150,1420 2150,1500 2050,1600 2050,1730 2055,1735 C1_LIMIT.2 U1_LIMIT.2 ; C1_FAN.2 U1_FAN.2 ; U1_HEAT.2 C1_HEAT.2 2735,1735 2730,1730 2730,1600 2930,1400 3225,1400 3250,1375 C1_VACUUM.2
  Top Layer w50: DB1_POW.3 737.64,1052.36 1050,740 J3_IN_TAB.1@1050,400
  Bottom Layer w30: J3_IN_TAB.2 1395,970 1395,1140 1670,1415 1845,1415 1890,1370 ; U1_VALVE.2 1890,1370 ; U1_LIMIT.2 2125,2245 2710,2245 2735,2220 U1_HEAT.2 ; U1_FAN.2 2570,1370 ; U1_VACUUM.2 3250,1370 3205,1415 2615,1415 2570,1370 ; 1890,1370 1935,1415 2525,1415 2570,1370
SWCLK: J1_DEBUG.3 U1_UC_INT.20 | length 759.8
  Top Layer w10: v1(2136.26,3850) J1_DEBUG.3 ; v1(2315,3625) 2384.84,3555.16 U1_UC_INT.20
  Bottom Layer w10: v1(2136.26,3850) 2136.26,3803.74 v1(2315,3625)
SWDIO: J1_DEBUG.4 U1_UC_INT.19 | length 705.1
  Top Layer w10: v1(2293.74,3850) J1_DEBUG.4 ; v1(2375,3625) 2410.43,3589.57 U1_UC_INT.19
  Bottom Layer w10: v1(2293.74,3850) 2293.74,3771.26 2375,3690 v1(2375,3625)
TH: J18_IN_TAB.1 J18_IN_TAB.2 M2_ACT_INT.1 | length 1859.1
  Top Layer w30: J18_IN_TAB.1 J18_IN_TAB.2 4290,715 4290,1950 4215,2025 M2_ACT_INT.1
VACUUM: D1_VACUUM.1 J10_IN_TAB.1 J10_IN_TAB.2 M2_ACT_INT.2 | length 2727.2
  Top Layer w30: J10_IN_TAB.1 J10_IN_TAB.2 4065,790 4180,790 4240,850 4240,1800 4015,2025 M2_ACT_INT.2
  Bottom Layer w30: D1_VACUUM.1 3585,800 3725,800 J10_IN_TAB.2
VACUUM_DIG: R2_VACUUM.2 U1_UC_INT.10 U1_VACUUM.3 | length 2194.3
  Top Layer w10: U1_UC_INT.10 2615.16,2794.84 2935,2475 2935,2010 3250,1695 U1_VACUUM.3
  Top Layer w20: U1_VACUUM.3 3250,1550 3320,1480 R2_VACUUM.2
VALVE_DIG: R2_VALVE.2 U1_UC_INT.6 U1_VALVE.3 | length 2510.3
  Top Layer w10: U1_VALVE.3 1790,1725 1645,1725 1605,1765 1605,1990 2005,2390 2005,2550 2512.8,3057.8 U1_UC_INT.6
  Top Layer w20: U1_VALVE.3 1890,1550 1960,1480 R2_VALVE.2
VALVE_IN: D1_VALVE.1 J8_IN_TAB.1 J8_IN_TAB.2 J9_IN_TAB.1 J9_IN_TAB.2 | length 1545
  Bottom Layer w30: J8_IN_TAB.1 J8_IN_TAB.1@1350,400 ; J8_IN_TAB.2@1350,600 J8_IN_TAB.1@1350,400 ; J9_IN_TAB.1 J9_IN_TAB.2 ; D1_VALVE.1 1900,825 1850,825 J9_IN_TAB.2 ; J8_IN_TAB.1@1350,400 J8_IN_TAB.2 J9_IN_TAB.2
W_DIG: R2_HEAT.2 U1_HEAT.3 U1_UC_INT.9 | length 1116.5
  Top Layer w10: U1_UC_INT.9 2589.57,2620.43 U1_HEAT.3
  Top Layer w20: U1_HEAT.3 2735,2400 2805,2330 R2_HEAT.2
W_IN: D1_HEAT.1 J5_IN_TAB.1 J5_IN_TAB.2 J6_IN_TAB.1 J6_IN_TAB.2 | length 2329.7
  Top Layer w30: D1_HEAT.1 2895,1745 3090,1550 3175,1550 3350,1375 3350,1135 3275,1060 v1(3275,975)
  Bottom Layer w30: J5_IN_TAB.1 J5_IN_TAB.2 ; v1(3275,975) 3275,880 3250,855 J5_IN_TAB.2 ; J6_IN_TAB.1 J6_IN_TAB.2 J5_IN_TAB.2
pads on no net: J1_DEBUG.NC M1_ACT_INT.1C M1_ACT_INT.4 M2_ACT_INT.3 M2_ACT_INT.6 MH1.1 MH2.1 MH3.1 MH4.1 U1_ACT_INT.5 U1_ACT_INT.6 U1_ACT_INT.7 U1_ACT_INT.10 U1_ACT_INT.11 U1_ACT_INT.12 U1_UC_INT.1 U1_UC_INT.2 U1_UC_INT.3 U1_UC_INT.14 U1_UC_INT.18

## Polygon pours and split planes (outlines as drawn)
GND on Bottom Layer "GND" (solid, remove dead copper, pour order 4): 4175,835 4200,860 4200,1000 4175,1025 3800,1025 3650,1175 3650,1595 3200,2045 3200,2775 2900,3075 2900,3925 0,3925 0,825 1835,825 1985,975 3410,975 3550,835
EXT_220V on Bottom Layer "EXT_220V_L02_P002" (solid, pour order 2): 4190,2410 4265,2410 4300,2375 4300,2300 4325,2275 4395,2205 4395,2090 4420,2065 4775,2065 4800,2090 4800,2310 4765,2345 4415,2345 4370,2390 4370,2425 4275,2520 4190,2520 4160,2490 4160,2440
220V_AC on Bottom Layer "220V_AC_L02_P003" (solid, pour order 3): 3930,2745 3960,2715 3960,2440 3990,2410 4040,2410 4070,2440 4070,2585 4135,2650 4400,2650 4425,2625 4425,2570 4400,2545 4400,2435 4425,2410 4775,2410 4800,2435 4800,2860 4775,2885 4440,2885 4405,2850 4175,2850 4100,2925 4100,3050 4075,3075 3825,3075 3800,3050 3800,2875
NetJ13_IN_TAB_1 on Bottom Layer "NETJ13_IN_TAB_1_L02_P001" (solid, pour order 1): 4425,1885 4400,1860 4400,840 4425,815 4775,815 4800,840 4800,1860 4775,1885
FAN_220V on Bottom Layer "FAN_220V_L02_P000" (solid, pour order 0): 4260,3115 4060,3115 3700,3475 3700,3700 3825,3825 4025,3825 4560,3290 4780,3290 4805,3265 4805,3145 4775,3115

## Keep-outs
Bottom Layer:
  lines w20: 1690,3925 2740,3925
Keep-Out Layer:
  pour cut-out: 1355,2190 1355,2330 1015,2330 1015,2190
  lines w10: 125,1825 125,2525 650,2525 650,1825 125,1825 ; 975,1560 1325,1560 1325,1845 975,1845 975,1560 ; 1070,2205 1345,2205 1345,2315 1070,2315 1070,2205 ; 1225,2725 1510,2725 1510,3075 1225,3075 1225,2725 ; 3400,2275 3400,2355 4250,2355 4250,2275 3400,2275 ; 3505,2950 3600,2950 3600,3700 3505,3700 3505,2950
  lines w20: 0,0 0,3925 1690,3925 1690,4360 2740,4360 2740,3925 5100,3925 5100,0 0,0

## Other copper
Bottom Layer:
  pour cut-out: 4550,2700 4575,2725 4625,2725 4650,2700 4650,2600 4625,2575 4575,2575 4550,2600
  pour cut-out: 4550,1700 4575,1725 4625,1725 4650,1700 4650,1600 4625,1575 4575,1575 4550,1600
  pour cut-out: 4550,1400 4575,1425 4625,1425 4650,1400 4650,1300 4625,1275 4575,1275 4550,1300
  pour cut-out: 4550,1100 4575,1125 4625,1125 4650,1100 4650,1000 4625,975 4575,975 4550,1000

## Silkscreen, mask and mechanical layers (free items; w line width, h text height)
Top Overlay:
  drawing of 207 lines, arcs and shapes, not listed
  text "Elec Air" at 575,3730 h161.42
  text "Timer Control" at 580,3585 h120
  text "v.A8.11" at 580,3485 h120
  text "S/N:" at 580,3385 h120
  text "Ind. Argentina" at 590,3285 h120
Bottom Overlay:
  text "SWCLK" at 2155.46,4264.16 h60 r90
  text "SWDIO" at 2312.94,4258.52 h60 r90
  text "nRST" at 1997.98,4236.27 h60 r90
  text "+3V3" at 2470.17,4230.74 h60 r90
  text "GND" at 1840.5,4226.78 h60 r90
  text "GND" at 2627.9,4226.78 h60 r90
Board Outline:
  lines w1: 0,0 5100,0 5100,3925 2740,3925 2740,4360 1690,4360 1690,3925 0,3925 0,0 ; 125,1825 125,2525 650,2525 650,1825 125,1825 ; 975,1560 975,1845 1325,1845 1325,1560 975,1560 ; 1070,2205 1070,2315 1345,2315 1345,2205 1070,2205 ; 1225,2725 1510,2725 1510,3075 1225,3075 1225,2725 ; 3400,2275 3400,2355 4250,2355 4250,2275 3400,2275 ; 3505,2950 3505,3700 3600,3700 3600,2950 3505,2950